# Altium PCB Main.PcbDoc
Units mil, origin at the board's own origin, x right, y up, seen from the top; angles counter-clockwise.
Board outline 6000 x 4000 mil, 2 copper layers (Top Layer, Bottom Layer); 20 components, 15 nets, 97 pads, 6 vias.
Unrouted connection lines stored in the file: 56.
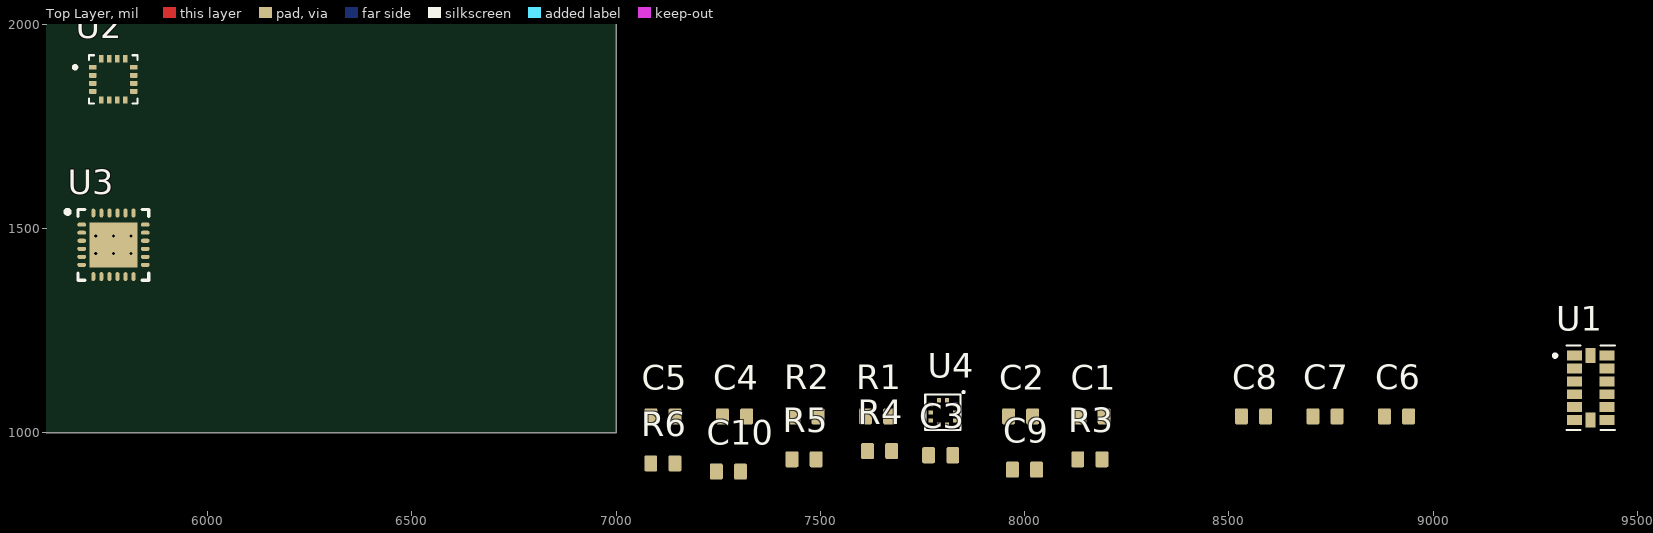
[diagram p0: Top Layer view]
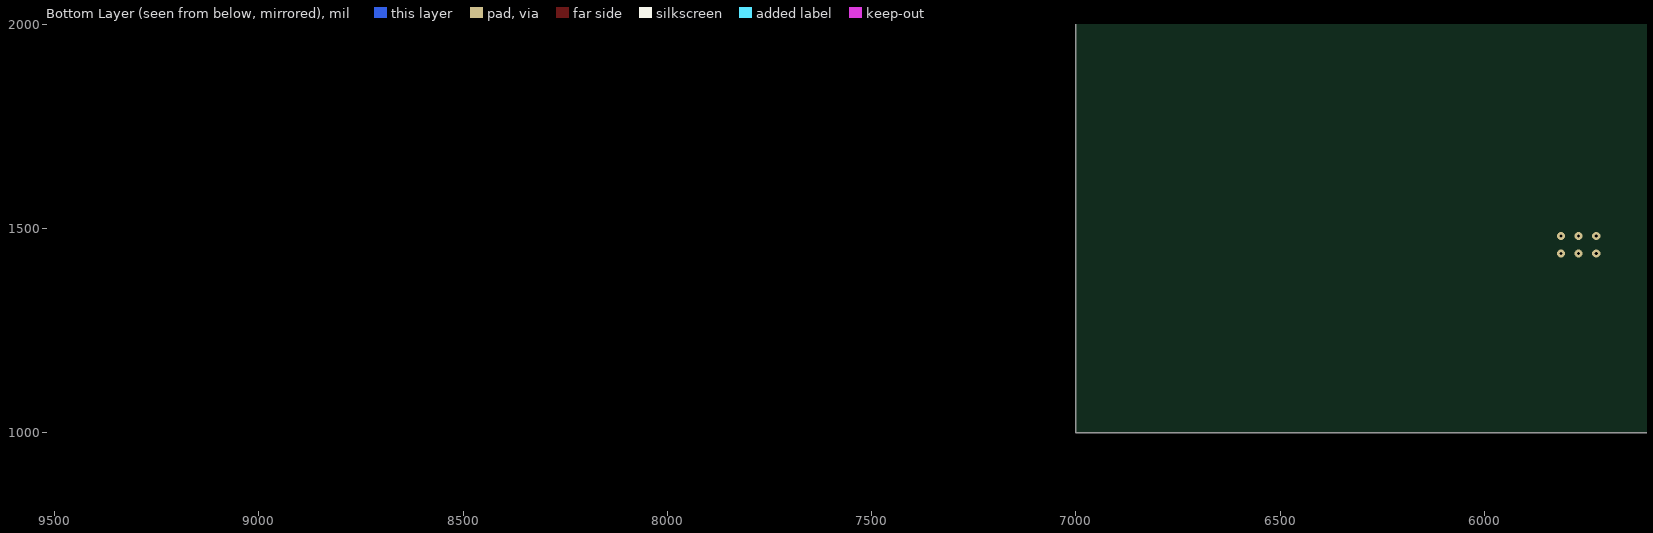
[diagram p1: Bottom Layer view, seen from below]

## Layer stack, top to bottom
Top Solder: solder mask 0.4, Solder Resist, Dk 3.5
Top Layer: signal copper 1.4
Dielectric 1: dielectric 12.6, FR-4, Dk 4.8
Bottom Layer: signal copper 1.4
Bottom Solder: solder mask 0.4, Solder Resist, Dk 3.5

## Board outline
1000,1000 7000,1000 7000,5000 1000,5000

## Design rules (kind name [scope] priority, off if disabled: settings)
Clearance [All] p1: gap=10 ignorepadtopadclearanceinfootprint=FALSE
PolygonConnect [All] p1: connectstyle=Relief reliefconductorwidth=10 reliefentries=4 polygonreliefangle="90 Angle" airgapwidth=10
RoutingVias [All] p1: holewidth=28 width=50 viastyle="Through Hole" minholewidth=28 minwidth=50 maxholewidth=28 maxwidth=50
SolderMaskExpansion [All] p1: expansion=4 istentingtop=FALSE
SupplyNets "Schematic Supply Nets_1" [InNet('5883L_S1')] p1: voltage=0.000
SupplyNets "Schematic Supply Nets" [InNet('GND')] p2: voltage=0.000
Width [All] p1: maxlimit=10 minlimit=10 preferedwidth=10
30 further rules are at their usual default settings.

## Components (designator, comment, footprint, x,y, rotation, side; value= is the part's Value field where it differs from the comment)
C1 "SMD 0603 100nF" CAP_0603 8165,1040 r0 top
C2 "SMD 0603 100nF" CAP_0603 7990,1040 r0 top
C3 "SMD 0603 100nF" CAP_0603 7794.53,945 r0 top
C4 "SMD 0603 4.7uF" CAP_0603 7290,1040 r0 top
C5 "SMD 0603 0.22uF" CAP_0603 7115,1040 r0 top
C6 "SMD 0603 2.2nF" CAP_0603 8910,1040 r0 top
C7 "SMD 0603 100nF" CAP_0603 8735,1040 r0 top
C8 "SMD 0603 10nF" CAP_0603 8560,1040 r0 top
C9 "SMD 0603 100nF" CAP_0603 7999.53,910 r0 top
C10 "SMD 0603 100nF" CAP_0603 7275,905 r0 top
R1 "0603 4.7K" RES_0603 7640,1040 r0 top
R2 "0603 4.7K" RES_0603 7465,1040 r0 top
R3 "0603 10R" RES_0603 8159.53,935 r0 top
R4 "0603 10R" RES_0603 7645,955 r0 top
R5 "0603 0R" RES_0603 7460,935 r0 top
R6 "0603 0R" RES_0603 7114.53,925 r0 top
U1 "ADXL345" PQFN80P500X300X100-14N 9385,1110 r0 top
U2 "HMC5883L-TR" XDCR_HMC5883L-TR 5769.53,1864.8 r0 top
U3 "ITG-3200" INSE-QFN-24_A_L 5770,1460 r0 top
U4 "BMP581" BMP581 7800,1050 r0 top

## Footprints (in the part's own frame and the unit in brackets; to place one, negate y for a bottom-side part, rotate by r counter-clockwise, add the part's x,y. Pads: shape width x height; smd on the part's side, far side on the other; paste and mask are expansions set on the pad)
BMP581 [mm]
  rect 0.25x0.275 smd paste-1: 1(0.25,0.763) 2(-0.25,0.763) 6(-0.25,-0.763) 7(0.25,-0.763)
  rect 0.275x0.25 smd paste-0.025: 3(-0.763,0.5) 4(-0.763,0) 5(-0.763,-0.5) 8(0.763,-0.5) 9(0.763,0) 10(0.763,0.5)
  silkscreen extent -1.1,-1.1 1.33,1.3, body extent -1,-1 1,1, height 0.8
CAP_0603 [mm]
  rrect25% 0.8x1 smd: 1(-0.75,0) 2(0.75,0)
  body extent -0.8,-0.4 0.8,0.4, height 0.51
INSE-QFN-24_A_L [mm] "QFN, 24-Leads, Body 4.1x4.1mm, Pitch 0.50mm, Thermal Pad 3.00x2.80mm, IPC High Density"
  oval 0.55x0.25 smd: 1(-1.975,1.25) 2(-1.975,0.75) 3(-1.975,0.25) 4(-1.975,-0.25) 5(-1.975,-0.75) 6(-1.975,-1.25) 13(1.975,-1.25) 14(1.975,-0.75) 15(1.975,-0.25) 16(1.975,0.25) 17(1.975,0.75) 18(1.975,1.25)
  oval 0.25x0.55 smd: 7(-1.25,-1.975) 8(-0.75,-1.975) 9(-0.25,-1.975) 10(0.25,-1.975) 11(0.75,-1.975) 12(1.25,-1.975) 19(1.25,1.975) 20(0.75,1.975) 21(0.25,1.975) 22(-0.25,1.975) 23(-0.75,1.975) 24(-1.25,1.975)
  rect 3x2.8 smd: 25(0,0)
  silkscreen extent -2.97,-2.2 2.2,2.2, body extent -2.05,-2.05 2.05,2.05, height 0.95
PQFN80P500X300X100-14N [mm]
  rect 0.92x0.61 smd mask+0.05: 1(-1.01,2) 2(-1.01,1.2) 3(-1.01,0.4) 4(-1.01,-0.4) 5(-1.01,-1.2) 6(-1.01,-2) 8(1.01,-2) 9(1.01,-1.2) 10(1.01,-0.4) 11(1.01,0.4) 12(1.01,1.2) 13(1.01,2)
  rect 0.61x0.92 smd mask+0.05: 7(0,-2.01) 14(0,2.01)
  silkscreen extent -2.31,-2.63 1.5,2.63, body extent -1.5,-2.5 1.5,2.5, height 1
RES_0603 [mm]
  rrect25% 0.8x1 smd: 1(-0.75,0) 2(0.75,0)
  body extent -0.8,-0.43 0.8,0.43, height 0.52
XDCR_HMC5883L-TR [mm]
  rrect17% 0.45x0.3 smd: 1(-1.275,0.75) 2(-1.275,0.25) 3(-1.275,-0.25) 4(-1.275,-0.75) 9(1.275,-0.75) 10(1.275,-0.25) 11(1.275,0.25) 12(1.275,0.75)
  rrect17% 0.3x0.45 smd: 5(-0.75,-1.275) 6(-0.25,-1.275) 7(0.25,-1.275) 8(0.75,-1.275) 13(0.75,1.275) 14(0.25,1.275) 15(-0.25,1.275) 16(-0.75,1.275)
  silkscreen extent -2.47,-1.5 1.5,1.5, body extent -1.5,-1.5 1.5,1.5, height 0.9

## Part data
C1 C2 C3 C4 C5 C6 C7 C8 C9 C10: library part CAP_0603, "Capacitor SMD 0603"
R1 R2 R3 R4 R5 R6: library part RES_0603, "Resistor SMD 0603"
U1: "Accelerometer X, Y, Z Axis ±2g, 4g, 8g, 16g 0.05Hz ~ 1.6kHz 14-LGA (3x5)", Package="LGA -14 Analog Devices", Check_prices=https://www.snapeda.com/parts/ADXL345/Analog+Devices/view-part/?ref=eda, MF="Analog Devices, Inc.", MP=ADXL345, SnapEDA_Link=https://www.snapeda.com/parts/ADXL345/Analog+Devices/view-part/?ref=snap
U2: "Board Mount Hall Effect / Magnetic Sensors Sensors, Transducers Magnetic - Hall Effect, Digital Switch, Linear, Compass (ICs) - IC COMPASS 3 AXIS I2C 16LCC SMD", Package="LCC-16 STMicroelectronics", Check_prices=https://www.snapeda.com/parts/HMC5883LTR/STMicroelectronics/view-part/?ref=eda, MF=STMicroelectronics, MP=HMC5883LTR, SnapEDA_Link=https://www.snapeda.com/parts/HMC5883LTR/STMicroelectronics/view-part/?ref=snap
U3: library part CMP-1753-00001-1, "Single-Chip, Digital-Output, MEMS Gyroscope, 2.1 to 3.6 V, -40 to 105 degC, 24 -Pin QFN, RoHS, Tape and Reel", Colour=Black, Package Quantity=1, ComponentLink1Description="Manufacturer URL", ComponentLink1URL=http://www.invensense.com/, ComponentLink2Description=Datasheet, ComponentLink2URL=http://www.farnell.com/datasheets/887152.pdf, Contact Finish=Tin, DatasheetVersion="Rev. 1.4, 03/2010", Lead Pitch="0.1 inch", Mount="Through Hole", PackageDescription="24-Pin Quad Flat No-lead Package, Body 4.00 x 4.00 mm, Pitch 0.50 mm, Thermal Pad 3.00 x 2.80 mm", PackageReference=QFN-24_A, Packaging=Bulk, Pins=36, RoHSCompliant=True
U4: "Very small, low-power and low noise 24-bit absolute barometric pressure sensor. This digital, high-performance sensor is ideally suited for a wide range of altitude tracking applications and offers outstanding design flexibility", Package=None, Availability=Unavailable, Check_prices=https://www.snapeda.com/parts/BMP581/Bosch/view-part/?ref=eda, MF=Bosch, MP=BMP581, Price=None, SnapEDA_Link=https://www.snapeda.com/parts/BMP581/Bosch/view-part/?ref=snap

## Via types
v1: diameter 19.68, hole 7.87, Top Layer to Bottom Layer, 6 vias

## Nets (pads, with @x,y where several pads share a name; then routed paths per layer and width w, separated by ;. In a path a pad name is that pad's centre, name@x,y a point inside that pad or via, vN(x,y) a via of type N, cw(c..) or ccw(c..) an arc to the next point about the centre after c; other vN are vias at no path point)
5883L_C1: C4.1 U2.10
5883L_S1: C1.2 C2.1 C3.1 C8.1 R1.2 R2.2 R3.1 R4.1 U1.1 U1.6 U1.7 U2.2 U2.4 U2.13 U3.8 U3.13
5883L_SETC: C5.1 U2.12
5883L_SETP: C5.2 U2.8
BMP581_VDDIO: C10.1 R4.2 R6.2 U4.1
GND: C1.1 C2.2 C3.2 C4.2 C6.1 C7.2 C8.2 C9.2 C10.2 R5.2 U1.2 U1.4 U1.5 U1.12 U2.9 U2.11 U3.1 U3.9 U3.11 U3.18 U4.3 U4.5 U4.8 U4.9
IMU_SCL: U1.14 U2.1 U3.23 U4.2
IMU_SDA: U1.13 U2.16 U3.24 U4.4
NetC6_2: C6.2 U3.20
NetC7_1: C7.1 U3.10
NetC9_1: C9.1 R3.2 U4.10
NetR1_1: R1.1
NetR2_1: R2.1
NetR5_1: R5.1 U4.7
NetR6_1: R6.1 U4.6
pads on no net: U1.3 U1.8 U1.9 U1.10 U1.11 U2.3 U2.5 U2.6 U2.7 U2.14 U2.15 U3.2 U3.3 U3.4 U3.5 U3.6 U3.7 U3.12 U3.14 U3.15 U3.16 U3.17 U3.19 U3.21 U3.22 U3.25
copper on no net:
  other v1: 5726.69,1438.35 5770,1438.35 5813.31,1438.35 5726.69,1481.65 5770,1481.65 5813.31,1481.65